# EAGLE board MLX_FIGARO (EAGLE 9.6.2)
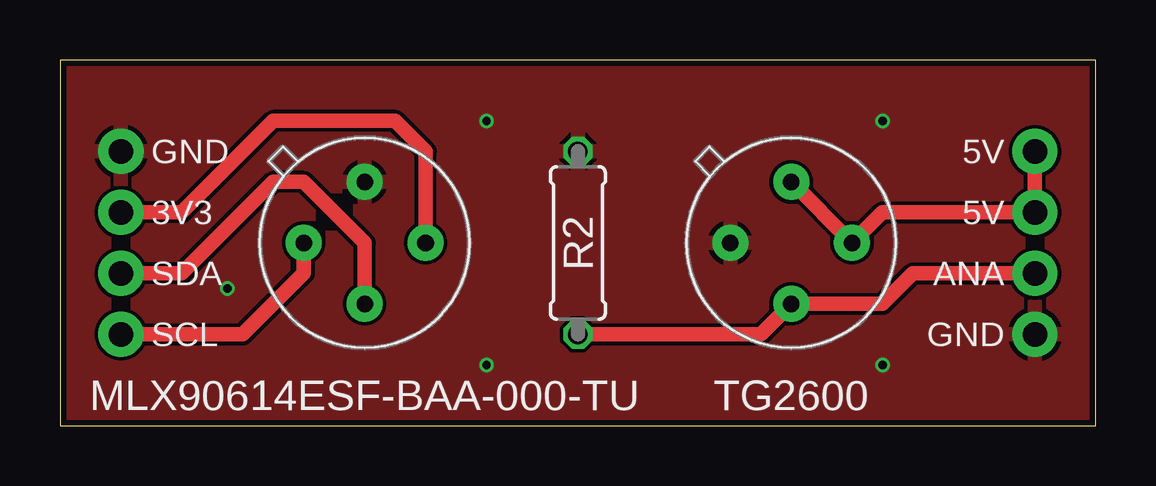
[diagram p0: board, top side]
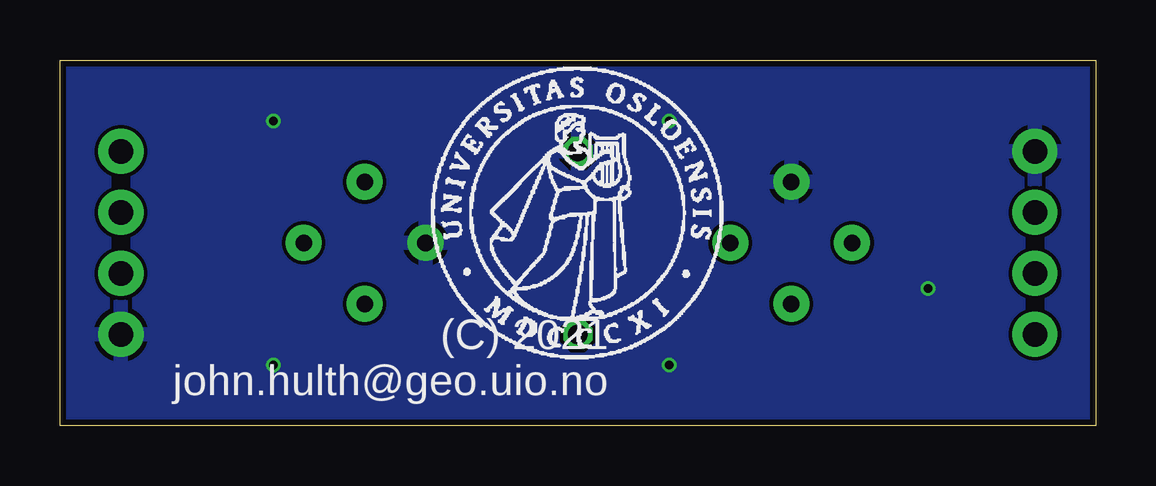
[diagram p1: board, bottom side, seen from below]

Size 43.18 x 15.24 mm. Coordinates in mm from the lower left corner, seen from the top.
Outline: 0,0 43.18,0 43.18,15.24 0,15.24 0,0
Copper layers (1*16): Top 0.018mm / dielectric 1.55mm / Bottom 0.018mm
Design rules "eC_2Layer_PClass6_BaseCopperO18_eCDefault": minimum track width 0.15mm, minimum drill 0.35mm, track to track 0.15mm, track to pad 0.15mm, pad to pad 0.15mm, via to via 0.15mm, smd to smd 0mil, copper to edge 0.25mm, drill to drill 0.35mm, minimum pad ring 0.175mm, minimum via ring 0.125mm, stop-mask expansion 0mil, vias tented up to drill 0.45mm, thermal gap 0.2mm

## Footprints (pad centres in the part's own frame; a part is rotated, then mirrored left to right if it is on the bottom)
1X04_NO_SILK = drill 1.016 pad 1.88: 1 0,0; 2 2.54,0; 3 5.08,0; 4 7.62,0
0207/7 = drill 0.813 octagon: 1 -3.81,0; 2 3.81,0
TO-5 = drill 0.69 pad 1.5: 1 -2.54,0; 2 0,-2.54; 3 2.54,0; 4 0,2.54
MLX90614ESFBAA000TU = drill 0.69 pad 1.5: 1 -2.54,0; 2 0,-2.54; 3 2.54,0; 4 0,2.54

## Placement (x,y rotation side)
J1  [1X04_NO_SILK]  40.64,11.43 270 top
J2  PTH  [1X04_NO_SILK]  2.54,11.43 270 top
R2  5k  [0207/7]  21.59,7.62 270 top
U1  TG2600  [TO-5]  30.48,7.62 0 top
U2  MLX90614ESF-BAA-000-TU  [MLX90614ESFBAA000TU]  12.7,7.62 0 top
U$3  [UIO-LOGO-BL]  27.94,2.54 0 bottom

## Library data of the parts
J1 = SparkFun-Connectors; PROD_ID: CONN-09696
J2 = SparkFun-Connectors
R2 = rcl; SPICEPREFIX: R
U1 = MLX_FIGARO
U2 = MLX_FIGARO; DESCRIPTION: Board Mount Temperature Sensors Digital, plug & play, infrared thermometer in a TO-can; HEIGHT: 4.25mm; MANUFACTURER_NAME: Melexis; MANUFACTURER_PART_NUMBER: MLX90614ESF-BAA-000-TU; RS_PART_NUMBER: 1942939; RS_PRICE-STOCK: http://uk.rs-online.com/web/p/products/1942939
U$3 = UIO-John

## Nets
3V3: J2.2 U2.3
5V: J1.1 J1.2 U1.3 U1.4
A3: J1.3 R2.2 U1.2
GND: J1.4 J2.1 R2.1 U1.1 U2.4
SCL: J2.4 U2.1
SDA: J2.3 U2.2

## Tracks (layer width: path | path; a pad name or v marks a point on that pad's centre or on a via)
3V3
  Top 0.61: U2.3 15.24,11.43 13.97,12.7 8.89,12.7 5.08,8.89 J2.2
5V
  Top 0.61: U1.4 U1.3 34.29,8.89 J1.2 J1.1
A3
  Top 0.61: R2.2 29.21,3.81 U1.2 34.29,5.08 35.56,6.35 J1.3
GND  (via drill 0.35)
  other vias: 6.99,5.71 17.78,12.7 17.78,2.54 34.29,2.54 34.29,12.7
  pour Top: 0,0 0,15.24 43.18,15.24 43.18,0
  pour Bottom: 0,15.24 43.18,15.24 43.18,0 0,0
SCL
  Top 0.61: J2.4 7.62,3.81 10.16,6.35 U2.1
SDA
  Top 0.61: U2.2 12.7,7.62 10.16,10.16 8.89,10.16 5.08,6.35 J2.3

## Text on the board
tPlace: GND | 5V | 3V3 | 5V | SDA | ANA | SCL | GND
bPlace: (C) 2021 / john.hulth@geo.uio.no